# Altium PCB PC110.PcbDoc (part 22 of 24)
Units mm, origin at the board's own origin, x right, y up, seen from the top; angles counter-clockwise.
Board outline 150.05 x 107.35 mm, 10 copper layers (In2.Cu, F.Cu, B.Cu, In1.Cu, In3.Cu, In4.Cu, In5.Cu, In6.Cu, In7.Cu, In8.Cu); 936 components, 1434 nets, 4891 pads, 6088 vias.
Unrouted connection lines stored in the file: 2995.
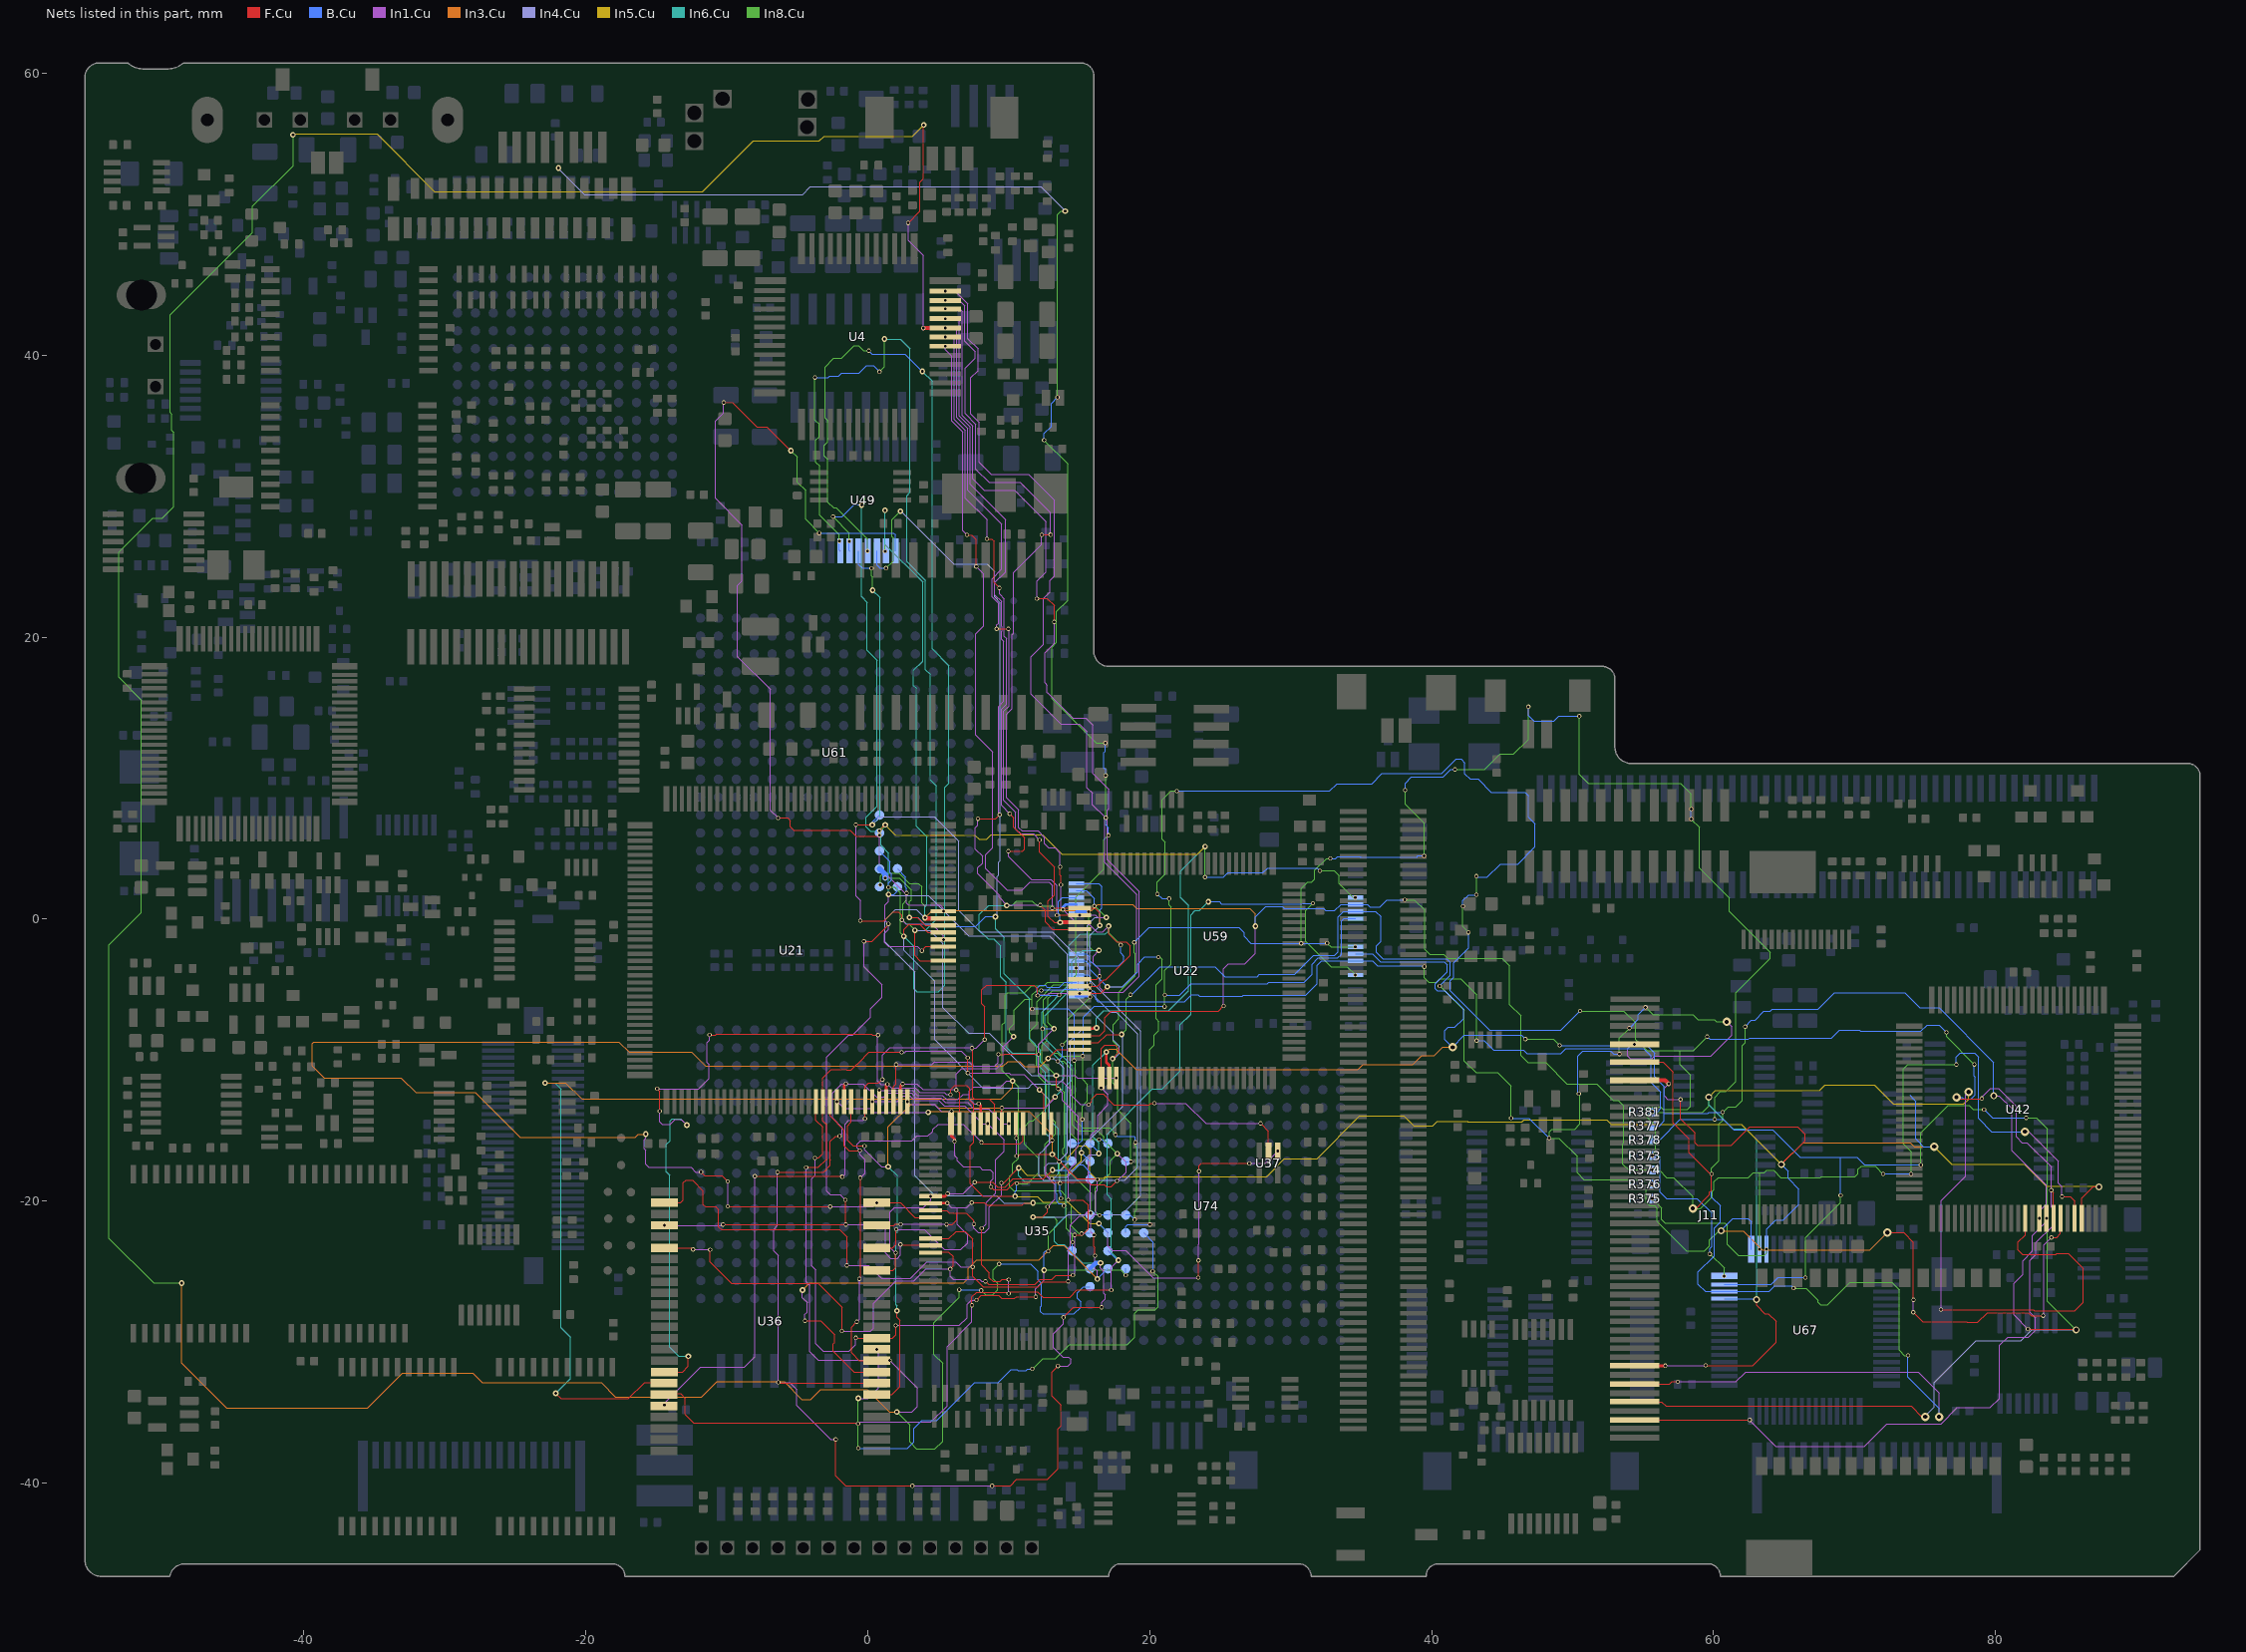
[diagram p29: the nets of this part, all layers, seen from the top]

## Via types
v1: diameter 0.3, hole 0.2, B.Cu to In8.Cu, tented both sides, 1934 vias
v2: diameter 0.4, hole 0.2, F.Cu to B.Cu, tented both sides, 1902 vias
v3: diameter 0.3, hole 0.2, F.Cu to In1.Cu, tented both sides, 1729 vias
v4: diameter 0.6, hole 0.3, F.Cu to B.Cu, tented both sides, 354 vias
v5: diameter 0.5, hole 0.3, F.Cu to B.Cu, tented both sides, 136 vias
v6: diameter 0.4, hole 0.2, B.Cu to In8.Cu, tented both sides, 12 vias
v7: diameter 0.3, hole 0.2, F.Cu to B.Cu, tented both sides, 6 vias
v8: diameter 0.6, hole 0.2, F.Cu to B.Cu, tented both sides, 4 vias
v9: diameter 0.5, hole 0.2, B.Cu to In8.Cu, tented both sides, 3 vias
v10: diameter 0.5, hole 0.2, F.Cu to B.Cu, tented both sides, 2 vias
v11: diameter 0.4, hole 0.3, F.Cu to B.Cu, tented both sides, 2 vias
v12: diameter 0.3, hole 0.2, F.Cu to In4.Cu, tented both sides, 2 vias
v13: diameter 0.6, hole 0.3, B.Cu to In8.Cu, tented both sides, 1 vias
v14: diameter 0.3, hole 0.2, F.Cu to In3.Cu, tented both sides, 1 vias

## Nets (pads, with @x,y where several pads share a name; then routed paths per layer and width w, separated by ;. In a path a pad name is that pad's centre, name@x,y a point inside that pad or via, vN(x,y) a via of type N, cw(c..) or ccw(c..) an arc to the next point about the centre after c; other vN are vias at no path point) (continued)
SA3: U4.45 U21.58 U22.29 U35.11 U36.11 U59.18 U74.E4 | length 144.3
  F.Cu w0.08: v3(-3.74,-16.93) -3.49,-16.93 -3.195,-16.635 -3.195,-14.735 -3.68,-14.25 U21.58@-3.68,-12.94 ; v3(-0.85,-29.69) -0.83,-29.71 U36.11@0.63,-29.71 1.75,-29.71 1.99,-29.47 v3(1.99,-28.81) ; v3(7.04,27.25) 7.37,27.25 7.7,26.92 v3(7.7,25.01) ; v3(7.72,-27.02) 8.06,-26.68 9.28,-26.68 9.5,-26.9 10.42,-26.9 10.54,-26.78 v3(11.91,-26.78) ; v2(11.73,-21.13) 12.38,-21.13 12.75,-20.76 v3(12.75,-20.41) ; U35.11@13.01,-14.5 13.01,-15.6 v3(13.09,-15.68) ; v3(13.09,0.8) 13.1,0.79 16.11,0.79 16.46,0.44 v2(16.46,-0.44)
  In1.Cu w0.08: v3(-3.74,-16.93) -3.74,-18.15 -3.98,-18.39 -3.98,-24.59 -3.69,-24.88 -3.69,-30.12 -3.17,-30.64 -1.33,-30.64 -0.85,-30.16 v3(-0.85,-29.69) ; v3(1.99,-28.81) 6.49,-28.81 7.04,-28.26 7.04,-27.31 7.33,-27.02 v3(7.72,-27.02) ; v3(5.5,40.64) 5.5,40.41 5.96,39.95 5.96,35.32 6.73,34.55 6.73,27.56 v3(7.04,27.25) ; v3(7.7,25.01) 8.24,24.47 8.24,20.82 7.67,20.25 7.67,13.06 8.86,11.87 8.86,5.08 8.36,4.58 8.36,3.59 9.87,2.08 10.96,2.08 11.5,2.62 12.85,2.62 13.09,2.38 v3(13.09,0.8) ; v3(11.91,-26.78) 11.91,-26.21 12.51,-25.61 v2(12.51,-24.89) ; v3(12.75,-20.41) 13.29,-19.87 13.29,-18.84 12.64,-18.19 12.64,-16.13 v3(13.09,-15.68)
  In4.Cu w0.08: v2(11.73,-21.13) 11.74,-21.14 14.01,-21.14 14.19,-20.96 18.03,-20.96 19.37,-19.62 19.37,-7.93 15.77,-4.33 15.77,-1.16 16.46,-0.47 v2(16.46,-0.44)
  In8.Cu w0.08: v2(11.73,-21.13) 11.74,-21.14 13.2,-21.14 13.42,-21.36 13.42,-21.73 12.81,-22.34 v1(12.81,-23.54) ; v2(12.51,-24.89) 17.94,-24.89 v1(18.3,-25.25)
  B.Cu w0.08: v2(12.51,-24.89) 12.51,-23.64 12.61,-23.54 v1(12.81,-23.54) ; U59.18@14.79,2.54 16.4,2.54 16.61,2.33 16.61,2.29 16.62,2.28 16.62,0.79 16.47,0.64 16.47,0.56 16.46,0.55 v2(16.46,-0.44) ; v1(18.3,-25.25) U74.E4@18.3,-24.77
SA4: U4.46 U21.59 U22.30 U35.12 U36.10 U59.17 U74.G5 | length 176.1
  F.Cu w0.08: v3(-4.37,-17.6) -3.51,-17.6 -2.93,-17.02 -2.93,-14.57 -3.18,-14.32 U21.59@-3.18,-12.94 -3.18,-11.26 -2.595,-10.675 -1.525,-10.675 -1.49,-10.71 -1.17,-10.71 -0.26,-9.8 -0.26,-9.77 0.085,-9.425 2.375,-9.425 v3(2.4,-9.45) ; v3(7.09,-9.83) 7.09,-10.9 v3(7.1,-10.91) ; v3(8.46,26.97) 8.8,26.97 8.96,26.81 8.96,23.87 v3(9.34,23.49) ; v3(9.98,4.82) 10.99,4.82 11.12,4.95 11.12,5.77 10.36,6.53 10.36,7.19 v3(10.07,7.48) ; v2(12.18,-12.1) 12.51,-12.43 U35.12@12.51,-14.5 ; v3(13.42,0.28) 13.43,0.29 v3(15.03,0.29)
  In1.Cu w0.08: v3(-4.37,-17.6) -4.37,-25.71 -4.11,-25.97 -4.11,-30.69 -3.53,-31.27 0.75,-31.27 ; v2(-0.67,-33.98) 0.01,-33.98 0.75,-33.24 0.75,-31.27 ; v3(0.63,-30.51) 0.77,-30.65 0.77,-31.25 0.75,-31.27 ; v3(2.4,-9.45) 2.64,-9.45 2.72,-9.37 6.63,-9.37 v3(7.09,-9.83) ; v3(5.5,41.29) 6.03,41.29 6.13,41.19 6.13,35.45 6.92,34.66 6.92,29.86 8.46,28.32 v3(8.46,26.97) ; v3(7.1,-10.91) 10.03,-10.91 10.12,-11 11.08,-11 v2(12.18,-12.1) ; v3(9.34,23.49) 9.34,23.07 9.69,22.72 9.69,20.07 9.84,19.92 9.84,15.26 9.48,14.9 9.48,8.07 v3(10.07,7.48) ; v3(9.98,4.82) 9.98,4.45 11.62,2.81 13.01,2.81 13.42,2.4 v3(13.42,0.28) ; v3(15.03,0.29) 16.14,0.29 16.31,0.12 v2(16.92,0.12)
  In4.Cu w0.08: v2(12.18,-12.1) 12.89,-12.81 12.89,-15.93 12.49,-16.33 12.49,-16.34 12.15,-16.68 12.15,-18.2 12.46,-18.51 18.22,-18.51 19.15,-17.58 19.15,-8.14 17.62,-6.61 17.22,-6.61 15.58,-4.97 15.58,-1.45 15.57,-1.44 15.57,-0.43 16.12,0.12 v2(16.92,0.12)
  In8.Cu w0.08: v2(-0.67,-33.98) -0.67,-37.51 v1(-0.66,-37.52) ; v1(11.68,-31.9) 12.43,-31.15 13.33,-31.15 14.31,-30.17 18.42,-30.17 18.95,-29.64 18.95,-27.94 19.2,-27.69 20.4,-27.69 20.59,-27.5 20.59,-25.35 v1(20.21,-24.97) ; v1(16.07,0.94) 16.1,0.94 v2(16.92,0.12)
  B.Cu w0.08: v1(-0.66,-37.52) 2.83,-37.52 3.29,-37.06 3.29,-36.1 3.84,-35.55 4.91,-35.55 7.58,-32.88 9.24,-32.88 10.17,-31.95 10.6,-31.95 10.67,-32.02 11.22,-32.02 11.34,-31.9 v1(11.68,-31.9) ; U59.17@14.79,2.04 15.49,2.04 16.07,1.46 v1(16.07,0.94) ; U74.G5@19.57,-22.23 20.26,-22.92 20.26,-24.92 v1(20.21,-24.97)
SA5: U4.47 U21.60 U22.31 U35.15 U36.9 U59.16 U74.D2 | length 348.2
  F.Cu w0.08: U21.60@-2.68,-12.94 -2.68,-13.95 -1.66,-14.97 -1.66,-16.06 -1.31,-16.41 v3(-0.56,-16.41) ; v3(-0.78,-28.55) -1.16,-28.93 -1.16,-30.75 -0.6,-31.31 U36.9@0.63,-31.31 0.65,-31.29 v3(1.55,-31.29) ; v3(-0.59,-25.51) -0.52,-25.44 v3(-0.52,-18.34) ; v3(2.87,49.38) 3.7,50.21 3.7,52.27 3.96,52.53 3.96,56.32 v2(3.97,56.33) ; v3(8.07,-15.83) 8.16,-15.92 10.79,-15.92 11.01,-15.7 U35.15@11.01,-14.5 ; v3(9.14,20.6) 9.96,20.6 v3(9.97,20.59) ; v3(12.18,5.62) 12.18,4.76 13.25,3.69 13.25,1.73 12.8,1.28 12.8,0.21 13.24,-0.23 v2(13.65,-0.23)
  F.Cu w0.3: v3(3.94,41.92) 3.96,41.94 v3(5.5,41.94) ; v2(13.65,-0.23) 13.67,-0.21 U22.31@15.03,-0.21
  In1.Cu w0.08: v3(-0.78,-28.55) -0.59,-28.36 v3(-0.59,-25.51) ; v3(-0.52,-18.34) -0.2,-18.02 -0.2,-17.07 -0.56,-16.71 v3(-0.56,-16.41) -0.77,-16.2 -0.77,-15.98 -0.52,-15.73 3.13,-15.73 3.48,-15.38 4.28,-15.38 4.62,-15.04 4.62,-14.92 5,-14.54 6.78,-14.54 v3(8.07,-15.83) ; v3(1.55,-31.29) 3.51,-33.25 3.51,-34.57 3.13,-34.95 v2(2.06,-34.95) ; v3(2.87,49.38) 2.87,48.14 3.94,47.07 v3(3.94,41.92) ; v3(5.5,41.94) 6.14,41.94 6.3,41.78 6.3,35.58 7.09,34.79 7.09,30.42 9.5,28.01 9.5,24.83 8.81,24.14 8.81,22.87 9.27,22.41 9.27,20.99 9.14,20.86 v3(9.14,20.6) ; v3(9.97,20.59) 10.02,20.54 10.02,15.13 9.65,14.76 9.65,8.43 10.5,7.58 10.5,6.39 10.84,6.05 11.75,6.05 v3(12.18,5.62)
  In3.Cu w0.08: v2(-48.67,-25.81) -48.67,-31.5 -45.49,-34.68 -35.48,-34.68 -33.01,-32.21 -28,-32.21 -27.34,-32.87 -18.91,-32.87 -17.9,-33.88 -11.78,-33.88 -10.7,-32.8 -5.92,-32.8 -4.67,-34.05 -4.04,-34.05 -3.34,-33.35 -0.06,-33.35 1.54,-34.95 v2(2.06,-34.95)
  In5.Cu w0.08: v2(-40.77,55.63) -40.71,55.69 -34.82,55.69 -30.74,51.61 -11.7,51.61 -8.1,55.21 -3.43,55.21 -3.1,55.54 3.18,55.54 v2(3.97,56.33)
  In8.Cu w0.08: v2(-48.67,-25.81) -50.66,-25.81 -53.83,-22.64 -53.83,-1.82 -51.53,0.48 -51.53,15.55 -53.13,17.15 -53.13,26.03 -50.73,28.43 -50.06,28.43 -49.23,29.26 -49.23,34.53 -49.37,34.67 -49.37,35.81 -49.49,35.93 -49.49,42.86 -43.64,48.71 -43.64,50.57 -40.76,53.45 -40.76,55.62 v2(-40.77,55.63) ; v2(2.06,-34.95) 2.78,-35.67 2.79,-35.67 2.98,-35.86 2.98,-37.08 3.46,-37.56 4.77,-37.56 5.31,-37.02 5.31,-31.5 4.69,-30.88 4.69,-28.62 6.49,-26.82 v1(6.49,-26.28) ; v1(8.05,-26.33) 8.35,-26.63 8.87,-26.63 9.21,-26.29 9.21,-25.84 8.89,-25.52 8.89,-24.88 v1(9.32,-24.45)
  B.Cu w0.08: v1(6.49,-26.28) 8,-26.28 v1(8.05,-26.33) ; v1(9.32,-24.45) 11.56,-24.45 12.09,-24.98 12.09,-25.58 12.34,-25.83 12.34,-27.43 12.27,-27.5 12.27,-27.84 12.43,-28 14.64,-28 15.11,-27.53 15.11,-27.13 14.88,-26.9 14.88,-26.49 15.31,-26.06 U74.D2@15.765,-26.06 ; v2(13.65,-0.23) 13.65,0.3 13.53,0.42 13.53,1.26 13.81,1.54 U59.16@14.79,1.54
SA6: U4.48 U21.61 U22.32 U35.16 U36.8 U59.15 U74.E3 | length 150.3
  F.Cu w0.08: v3(-4.46,-28.48) -3.32,-28.48 -2.345,-29.455 -2.345,-30.025 -2.44,-30.12 -2.44,-30.63 -0.96,-32.11 U36.8@0.63,-32.11 ; v3(7.81,7.13) 9.07,7.13 v3(9.35,7.41) ; U35.16@10.51,-14.5 10.54,-14.53 v3(10.54,-15.52) ; v3(10.56,-16.8) 10.67,-16.8 10.79,-16.68 v2(13.09,-16.68) 14.83,-18.42 16.25,-18.42 v3(16.28,-18.45) ; v3(12.23,1.01) 12.62,0.62 12.62,-0.21 13.12,-0.71 U22.32@15.03,-0.71 ; v3(16.05,-22.4) 16.05,-23.21 16.12,-23.28 v3(16.12,-23.86)
  In1.Cu w0.08: v2(-4.63,-26.31) -4.63,-26.84 -4.3,-27.17 -4.3,-27.87 -4.46,-28.03 v3(-4.46,-28.48) ; v3(-2.18,-12.94) -1.69,-13.43 0.17,-13.43 0.43,-13.69 v2(4.29,-13.69) ; v3(5.5,42.59) 6.32,42.59 6.5,42.41 6.5,35.68 7.28,34.9 7.28,30.83 9.78,28.33 9.78,24.63 9.015,23.865 9.015,23.015 9.49,22.54 9.49,20.78 9.515,20.755 9.515,20.445 9.49,20.42 9.49,19.86 9.64,19.71 9.64,15.45 9.28,15.09 9.28,7.48 v3(9.35,7.41) ; v3(7.81,7.13) 7.81,6.67 7.62,6.48 7.62,4.98 8.14,4.46 8.14,3.99 7.8,3.65 7.8,3.24 9.31,1.73 9.31,1.57 9.86,1.02 v2(9.86,0.97) 9.9,1.01 v3(12.23,1.01) ; v3(10.54,-15.52) 10.56,-15.54 v3(10.56,-16.8) ; v3(16.05,-22.4) 15.82,-22.17 15.82,-21.25 16.19,-20.88 16.19,-19.32 16.28,-19.23 v3(16.28,-18.45) ; v3(16.12,-23.86) 16.12,-24.8 16.28,-24.96 v2(16.28,-25.52)
  In3.Cu w0.08: -4.63,-26.24 v2(-4.63,-26.31) -4.13,-25.81 6.8,-25.81 7.13,-25.48 7.13,-24.76 7.74,-24.15 12.15,-24.15 13.16,-23.14 13.9,-23.14 v2(16.28,-25.52) ; v2(4.29,-13.69) 4.34,-13.64 11.45,-13.64 13.09,-15.28 v2(13.09,-16.68)
  In6.Cu w0.08: v2(9.86,0.97) 8.56,0.97 7.92,0.33 7.92,-0.8 8.53,-1.41 8.94,-1.41 9.44,-1.91 9.44,-4.1 9.82,-4.48 9.82,-9.08 10.23,-9.49 11.78,-9.49 12.07,-9.78 12.07,-10.35 12.61,-10.89 12.61,-15.18 12.95,-15.52 12.95,-15.53 13.09,-15.67 v2(13.09,-16.68)
  In8.Cu w0.08: v2(9.86,0.97) 10.23,0.97 10.55,1.29 11.67,1.29 12.04,0.92 13.12,0.92 13.35,0.69 v1(13.85,0.69)
  B.Cu w0.08: v2(16.28,-25.52) 17.01,-24.79 U74.E3@17.035,-24.79 17.035,-24.795 U74.E3@17.03,-24.8
  B.Cu w0.2: v1(13.85,0.69) 13.85,0.84 14.05,1.04 U59.15@14.79,1.04
SA7: U4.49 U21.62 U22.39 U35.17 U36.7 U59.14 U74.E2 | length 190.9
  F.Cu w0.08: v3(-6.4,-17.94) -3.13,-17.94 -2.65,-17.46 -2.65,-17.08 -2.665,-17.065 -2.665,-15.765 -2.29,-15.39 v3(-1.99,-15.39) ; v3(-6.34,-32.85) -6.28,-32.91 U36.7@0.63,-32.91 ; v3(-2.27,-36.89) -2.27,-39.49 -1.57,-40.19 v3(3.17,-40.19) ; v3(8.82,-40.19) 10.12,-40.19 10.57,-39.74 12.75,-39.74 13.5,-38.99 13.5,-36.16 13.71,-35.95 13.71,-34.45 13.07,-33.81 13.07,-32.11 v3(13.49,-31.69) ; v3(12,22.74) 12.73,22.74 13.23,22.24 v3(13.23,21.09) ; v3(13.88,-28.24) 14.6,-27.52 v3(16.58,-27.52) ; U22.39@15.03,-4.26 16.24,-4.26 v3(16.45,-4.05)
  F.Cu w0.2: U21.62@-1.68,-12.94 -1.68,-11.79 v3(-1.56,-11.67)
  In1.Cu w0.08: v3(-6.4,-17.94) -6.4,-21.74 -6.67,-22.01 -6.67,-23.53 -6.34,-23.86 v3(-6.34,-32.85) -5.53,-32.85 -5.02,-33.36 -5.02,-34.49 -2.62,-36.89 v3(-2.27,-36.89) ; v3(-1.99,-15.39) -1.8,-15.2 -1.8,-14.79 -2.5,-14.09 -2.5,-12.31 -1.86,-11.67 v3(-1.56,-11.67) -0.32,-11.67 0.61,-12.6 1.16,-12.6 1.42,-12.34 3.09,-12.34 3.42,-12.67 5.17,-12.67 5.51,-13.01 7.09,-13.01 7.53,-13.45 8.59,-13.45 9.64,-14.5 v3(10.01,-14.5) ; v3(3.17,-40.19) v3(8.82,-40.19) ; v3(5.5,43.29) 6.54,43.29 6.71,43.12 6.71,35.73 7.46,34.98 7.46,31.23 8.25,30.44 10.4,30.44 12.64,28.2 12.64,24.64 12,24 v3(12,22.74) ; v3(13.23,21.09) 13.23,19.56 12.56,18.89 12.56,16.76 12.72,16.6 12.72,16.07 12.74,16.07 14.55,14.26 15.46,14.26 15.96,13.76 15.96,10.35 17.11,9.2 17.11,7.85 16.98,7.72 16.98,4.24 19.25,1.97 19.25,-4.06 18.14,-5.17 16.75,-5.17 16.45,-4.87 v3(16.45,-4.05) 16.45,-3.6 15.99,-3.14 15.99,-2.62 v2(16.4,-2.21) ; v3(13.49,-31.69) 14.2,-31.69 14.4,-31.49 14.4,-31.22 14.25,-31.07 13.84,-31.07 13.16,-30.39 13.16,-29.4 13.88,-28.68 v3(13.88,-28.24) ; v2(16.51,-24.38) 16.51,-24.73 16.72,-24.94 16.72,-24.99 16.74,-25.01 16.74,-26.54 16.85,-26.65 16.85,-26.91 16.59,-27.17 16.59,-27.51 v3(16.58,-27.52)
  In6.Cu w0.08: v2(16.4,-2.21) 15.26,-2.21 14.49,-2.98 14.49,-4.91 12.57,-6.83 12.57,-8.47 14.49,-10.39 14.49,-11.39 14.06,-11.82 14.06,-21.05 13.24,-21.87 13.24,-22.87 13.44,-23.07 13.9,-23.07 15.21,-24.38 v2(16.51,-24.38)
  In8.Cu w0.08: v1(15.67,0.54) 15.67,-1.93 15.95,-2.21 v2(16.4,-2.21)
  B.Cu w0.2: U59.14@14.79,0.54 v1(15.67,0.54)
  B.Cu w0.3: U74.E2@15.765,-24.79 16.175,-24.38 v2(16.51,-24.38)
SA8: U4.50 U21.63 U22.40 U35.18 U36.6 U59.8 U74.F1 | length 145.7
  F.Cu w0.08: U21.63@-1.18,-12.94 -1.18,-14.38 -1.44,-14.64 -1.44,-15.68 -1.04,-16.08 v3(-0.23,-16.08) ; U36.6@0.63,-33.71 1.73,-33.71 2.28,-33.16 2.28,-28.44 2.07,-28.23 v2(2.07,-27.77) ; U35.18@9.51,-14.5 v3(9.51,-13.38) ; v3(12.34,27.26) 12.96,27.26 v3(12.97,27.27) ; v3(13.65,3.72) 13.65,3.12 13.7,3.07 13.7,2.45 v3(13.71,2.44) ; U22.40@15.03,-4.76 16.28,-4.76 16.75,-4.29 16.9,-4.29 18.63,-2.56 18.63,-1.9 18.62,-1.9 18.34,-1.62 17.68,-1.62 17.09,-1.03 v2(17.09,-0.49)
  In1.Cu w0.08: v3(-0.23,-16.08) -0.23,-16.34 0.98,-17.55 v2(1.45,-17.55) ; v3(5.5,43.89) 6.5,43.89 6.89,43.5 6.89,40.98 7.62,40.25 7.62,39.795 6.9,39.075 6.9,35.86 7.67,35.09 7.67,31.92 8.6,30.99 10.8,30.99 12.97,28.82 v3(12.97,27.27) ; v3(9.51,-13.38) 12.58,-13.38 13.28,-12.68 13.28,-12.62 v2(13.29,-12.61) ; v3(12.34,27.26) 12.34,26.58 10.36,24.6 10.36,20.28 10.25,20.17 10.25,14.93 9.86,14.54 9.86,8.6 10.7,7.76 10.7,6.5 10.94,6.26 12.07,6.26 12.54,5.79 12.54,5.37 12.83,5.08 13.27,5.08 13.65,4.7 v3(13.65,3.72) ; v3(13.71,2.44) 13.71,0.82 14.81,-0.28 15.63,-0.28 16.25,-0.9 16.68,-0.9 v2(17.09,-0.49)
  In3.Cu w0.08: v2(1.45,-17.55) 1.45,-14.73 3.05,-13.13 4.77,-13.13 5.02,-13.38 12.52,-13.38 v2(13.29,-12.61)
  In6.Cu w0.08: v2(1.45,-17.55) 2.09,-18.19 2.09,-22.18 2.01,-22.26 2.01,-27.33 2,-27.34 2.07,-27.41 v2(2.07,-27.77) ; v2(13.29,-12.61) 13.85,-12.05 13.85,-10.22 12.35,-8.72 12.35,-6.59 14.28,-4.66 14.28,-1.87 15.09,-1.06 16.86,-1.06 17.09,-0.83 v2(17.09,-0.49)
  In8.Cu w0.08: v1(13.06,-18.39) 12.59,-17.92 12.59,-15.95 13.33,-15.21 13.33,-14.42 12.87,-13.96 12.87,-13.03 v2(13.29,-12.61) ; v1(13.92,-20.32) 14.11,-20.51 14.11,-21.95 14.53,-22.37 v1(14.53,-22.91) ; v2(17.09,-0.49) 17.09,-0.97 v1(17.95,-1.83)
  B.Cu w0.08: v1(13.06,-18.39) 13.35,-18.68 13.35,-19.42 13.41,-19.48 13.41,-20.04 13.54,-20.17 13.74,-20.17 13.89,-20.32 v1(13.92,-20.32) ; U74.F1@14.495,-23.52 14.53,-23.485 v1(14.53,-22.91) ; U59.8@14.79,-2.46 15.51,-2.46 15.69,-2.64 15.69,-2.87 16.13,-3.31 17.81,-3.31 18.17,-2.95 18.17,-2.62 17.95,-2.4 v1(17.95,-1.83)
SA9: U4.51 U21.65 U22.41 U35.19 U36.44 U59.7 U74.G4 | length 156.5
  F.Cu w0.08: v3(-8,-18.23) -1.85,-18.23 v3(-1.81,-18.27) ; v3(-0.19,-14.15) -0.18,-14.14 U21.65@-0.18,-12.94 -0.18,-11.87 0.06,-11.63 0.78,-11.63 v3(1.04,-11.37) ; v3(7.4,-9.14) 7.45,-9.19 7.45,-12.64 7.55,-12.74 8.62,-12.74 9.01,-13.13 U35.19@9.01,-14.5 ; v3(8.3,-8.54) 8.3,-6.19 8.1,-5.99 8.1,-5 8.43,-4.67 11.79,-4.67 12.05,-4.93 v3(12.05,-5.41) ; v3(15.03,-5.26) 16.52,-5.26 v2(16.99,-4.79)
  In1.Cu w0.08: v3(-14.42,-34.46) -14.42,-34.31 -11.87,-31.76 -8.74,-31.76 -8,-31.02 v3(-8,-18.23) ; v3(-1.81,-18.27) -1.61,-18.07 -1.61,-14.54 -1.35,-14.28 -0.32,-14.28 v3(-0.19,-14.15) ; v3(1.04,-11.37) 1.04,-9.64 1.58,-9.1 7.36,-9.1 v3(7.4,-9.14) 7.7,-9.14 v3(8.3,-8.54) ; v3(5.5,44.54) 6.21,44.54 7.09,43.66 7.09,41.18 7.82,40.45 7.82,38.92 7.31,38.41 7.31,35.83 7.91,35.23 7.91,32.4 8.75,31.56 11.41,31.56 13.26,29.71 13.26,24.34 12.93,24.01 12.93,23.21 12.47,22.75 12.47,19.51 11.59,18.63 11.59,15.95 13.69,13.85 15.03,13.85 15.56,13.32 15.56,9.33 15.94,8.95 15.94,8.13 16.8,7.27 16.8,4.02 19.08,1.74 19.08,-3.78 18.07,-4.79 v2(16.99,-4.79) ; v3(12.05,-5.41) 12.12,-5.34 12.76,-5.34 12.84,-5.26 v3(15.03,-5.26)
  In8.Cu w0.08: v1(20.02,-21.66) 19.99,-21.63 19.99,-9.25 20.31,-8.93 20.31,-8.22 20.64,-7.89 20.64,-7.25 20.44,-7.05 20.44,-4.66 20.87,-4.23 20.87,-2.86 20.69,-2.68 v1(20.62,-2.68)
  B.Cu w0.08: U59.7@14.79,-2.96 15.44,-2.96 15.75,-3.27 15.75,-3.55 v2(16.99,-4.79) 18.09,-4.79 19.14,-3.74 19.14,-3.2 19.66,-2.68 v1(20.62,-2.68) ; U74.G4@18.3,-22.23 18.3,-21.79 18.44,-21.65 20.01,-21.65 v1(20.02,-21.66)
SA10: U21.66 U35.20 U36.43 U59.36 U74.F3 | length 112.6
  F.Cu w0.08: U36.43@-14.42,-33.66 -13.27,-33.66 -12.94,-33.99 -12.94,-35.13 -12.34,-35.73 -0.73,-35.73 v3(-0.68,-35.78) ; v3(7.39,-27.38) 7.39,-26.8 7.74,-26.45 9.89,-26.45 v3(9.99,-26.55) 10.1,-26.44 12.05,-26.44 12.42,-26.81 14.34,-26.81 14.85,-26.3 v3(17.27,-26.3) ; v3(8.08,-21.92) 8.08,-24.52 8.63,-25.07 8.63,-25.44 8.89,-25.7 9.4,-25.7 9.54,-25.56 v3(10,-25.56)
  In1.Cu w0.08: v3(-0.68,-35.78) -0.56,-35.66 4.49,-35.66 5.63,-34.52 5.63,-30.31 7.39,-28.55 v3(7.39,-27.38) ; v3(0.32,-12.94) 2.1,-12.94 2.51,-12.53 2.99,-12.53 3.33,-12.87 5.05,-12.87 5.43,-13.25 6.89,-13.25 8.14,-14.5 v3(8.51,-14.5) 9.66,-15.65 9.66,-16.46 9.07,-17.05 9.07,-19.42 8.39,-20.1 8.39,-21.61 v3(8.08,-21.92) ; v3(9.99,-26.55) 10,-26.54 v3(10,-25.56) ; v3(17.27,-26.3) 17.27,-24.7 v2(17.78,-24.19)
  In6.Cu w0.08: v2(17.78,-24.19) 17.78,-24.14 17.28,-23.64 17.28,-19.85 16.98,-19.55 16.98,-15.25 20.18,-12.05 20.87,-12.05 22.17,-10.75 22.17,-7.48 22.93,-6.72 22.93,0.31 23.23,0.61 23.53,0.61 v2(24.16,1.24)
  In8.Cu w0.08: v1(31.57,1.13) 31.07,0.63 31.07,-1.57 32.87,-3.37 34,-3.37 v1(34.59,-3.96)
  B.Cu w0.08: U74.F3@17.03,-23.5 17.72,-24.19 v2(17.78,-24.19) ; v2(24.16,1.24) 24.93,1.24 25.09,1.08 30.79,1.08 30.84,1.13 v1(31.57,1.13)
SA11: U21.67 U35.21 U36.42 U59.6 U74.G2 | length 205.3
  F.Cu w0.08: v2(-22.13,-33.63) -21.75,-34.01 -16.97,-34.01 -15.82,-32.86 U36.42@-14.42,-32.86 ; U21.67@0.82,-12.94 v3(0.82,-12.13)
  F.Cu w0.2: v3(7.87,-13.09) 8.01,-13.23 U35.21@8.01,-14.5
  In1.Cu w0.08: v3(0.82,-12.13) 0.85,-12.16 3.18,-12.16 3.51,-12.49 5.29,-12.49 5.59,-12.79 6.4,-12.79 6.76,-12.43 7.21,-12.43 ; v3(7.87,-13.09) 7.55,-13.09 7.21,-12.75 7.21,-12.43 ; v2(10.27,-11.47) 9.84,-11.47 9.42,-11.89 7.51,-11.89 7.21,-12.19 7.21,-12.43
  In3.Cu w0.08: v2(-22.89,-11.61) -21.43,-11.61 -20.28,-12.76 9.45,-12.76 10.27,-11.94 v2(10.27,-11.47)
  In4.Cu w0.08: v2(-21.94,53.28) -21.94,53.23 -20.1,51.39 -4.62,51.39 -4.07,51.94 12.29,51.94 v2(14.01,50.22)
  In6.Cu w0.08: v2(-22.89,-11.61) -22.19,-11.61 -21.76,-12.04 -21.76,-28.96 -21.08,-29.64 -21.08,-32.58 v2(-22.13,-33.63)
  In8.Cu w0.08: v1(12.51,33.97) 14.19,32.29 14.19,22.61 13.4,21.82 13.4,19.64 13.06,19.3 13.06,15.66 16.22,12.5 v1(16.85,12.5) ; v1(13.46,37.02) 13.46,49.98 13.7,50.22 v2(14.01,50.22) ; v1(15.17,-22.3) 14.97,-22.3 14.43,-21.76 14.43,-20.3 14.03,-19.9 14.03,-19.59 13.69,-19.25 10.35,-19.25 10.07,-18.97 10.07,-18.23 10.28,-18.02 10.28,-17.35 10.69,-16.94 10.69,-11.89 v2(10.27,-11.47) 9.54,-10.74 9.54,-7.48 9.73,-7.29 9.73,-5.39 9.91,-5.21 11.14,-5.21 11.63,-4.72 12.49,-4.72 12.75,-4.46 14.27,-4.46 14.79,-3.94 v1(14.79,-3.46) 14.78,-3.45 14.78,1.56 16.76,3.54 16.76,5.63 v1(17.08,5.95) ; v1(16.88,10.2) 16.89,10.19 v1(16.89,7.19)
  B.Cu w0.08: v1(12.51,33.97) 12.51,34.45 13.02,34.96 13.02,36.58 v1(13.46,37.02) ; v1(15.17,-22.3) 15.22,-22.25 U74.G2@15.765,-22.25 15.765,-22.255 U74.G2@15.76,-22.26 ; v1(16.85,12.5) 16.85,11.9 16.76,11.81 16.76,10.73 16.88,10.61 v1(16.88,10.2) ; v1(16.89,7.19) 16.89,6.69 17.08,6.5 v1(17.08,5.95)
SA12: U21.68 U35.22 U36.41 U37.1 U59.5 U74.G3 | length 121.9
  F.Cu w0.08: v3(-14.94,-12.03) -14.76,-12.21 v3(-14.76,-13.61) ; U36.41@-14.42,-32.11 -13.14,-32.11 -12.73,-31.7 v2(-12.73,-31) ; v3(-11.22,-8.21) -10.78,-8.21 -10.73,-8.16 0.27,-8.16 0.33,-8.22 v3(0.73,-8.22) ; v3(5.88,-12.44) 5.88,-12.09 6.18,-11.79 7.03,-11.79 7.23,-11.99 7.23,-12.84 7.51,-13.12 7.51,-15.81 7.26,-16.06 7.26,-18.76 8.15,-19.65 v2(10.45,-19.65) ; v3(23.45,-25.43) 23.46,-25.42 v3(23.46,-24.2) ; v3(23.5,-17.87) 23.5,-17.49 23.67,-17.32 v3(27.07,-17.32)
  F.Cu w0.2: U21.68@1.32,-12.94 1.32,-11.79 v3(1.4,-11.71)
  In1.Cu w0.08: v3(-14.94,-12.03) -12.01,-12.03 -11.27,-11.29 -11.27,-10.29 -11.4,-10.16 -11.4,-8.76 -11.22,-8.58 v3(-11.22,-8.21) ; v3(-14.76,-13.61) -14.76,-14.38 -14.58,-14.56 -14.03,-14.56 -13.67,-14.2 -13.23,-14.2 v2(-12.83,-14.6) ; v3(0.73,-8.22) 0.68,-8.27 0.68,-11.46 0.93,-11.71 v3(1.4,-11.71) 1.67,-11.98 3.39,-11.98 3.69,-12.28 5.42,-12.28 5.58,-12.44 v3(5.88,-12.44) ; v2(16.4,-21.59) 17.04,-22.23 17.04,-23.17 17.35,-23.48 18.31,-23.48 20.26,-25.43 v3(23.45,-25.43) ; v3(23.46,-24.2) 23.45,-24.19 23.45,-23.08 23.5,-23.03 v3(23.5,-17.87) ; v3(27.07,-17.32) 28.21,-17.32 v3(29.08,-16.45)
  In5.Cu w0.08: v2(10.45,-19.65) 10.48,-19.68 12.06,-19.68 12.44,-20.06 14.21,-20.06 15.74,-21.59 v2(16.4,-21.59)
  In6.Cu w0.08: v2(-12.83,-14.6) -13.19,-14.24 -13.22,-14.24 -13.3,-14.16 -13.86,-14.16 -14.02,-14.32 -14.02,-15.7 -14.3,-15.98 -14.3,-17.9 -14.04,-18.16 -14.04,-30.36 -13.4,-31 v2(-12.73,-31)
  In8.Cu w0.08: v1(10.58,-18.74) 11.35,-18.74 12.12,-17.97 12.12,-16.95 11.12,-15.95 11.12,-14.71 11.51,-14.32 11.74,-14.32 12.68,-13.38 12.68,-11.73 12.1,-11.15 12.1,-10.51 11.98,-10.39 11.98,-9.08 11.5,-8.6 11.5,-7.95 12,-7.45 12,-5.84 13.18,-4.66 v1(15.78,-4.66)
  B.Cu w0.08: v2(10.45,-19.65) 10.45,-19.33 10.56,-19.22 10.56,-18.76 v1(10.58,-18.74) ; U59.5@14.79,-3.96 15.64,-3.96 15.78,-4.1 v1(15.78,-4.66) ; v2(16.4,-21.59) 16.4,-21.6 U74.G3@17.03,-22.23
SA13: U21.69 U37.2 U59.4 U74.H2 | length 61.9
  F.Cu w0.08: U21.69@1.82,-12.94 1.82,-11.86 2.01,-11.67 v3(2.01,-10.31) ; v3(9.26,-9.59) 9.68,-9.59 9.71,-9.56 11.69,-9.56 11.71,-9.58 v3(12.11,-9.58) ; v3(15.67,-13.15) 15.9,-12.92 15.9,-12.75 16.24,-12.41 16.7,-12.41 17.45,-13.16 19.96,-13.16 20.07,-13.05 v3(20.34,-13.05) ; v3(27.87,-14.48) 28.43,-15.04 U37.2@28.43,-16.45
  In1.Cu w0.08: v3(2.01,-10.31) 4.56,-10.31 4.73,-10.14 7.21,-10.14 7.48,-10.41 9,-10.41 9.26,-10.15 v3(9.26,-9.59) ; v2(13.22,-7.77) 12.11,-8.88 v3(12.11,-9.58) 12.11,-10.9 12.73,-11.52 13.8,-11.52 14.4,-12.12 14.4,-12.47 15.08,-13.15 v3(15.67,-13.15) ; v3(20.34,-13.05) 22.56,-13.05 23.99,-14.48 v3(27.87,-14.48)
  In8.Cu w0.08: v1(12.4,-7.77) 12.4,-8.58 12.16,-8.82 12.16,-10.28 12.3,-10.42 12.3,-11.03 13.02,-11.75 13.4,-11.75 13.94,-12.29 13.94,-16.19 13.84,-16.29 13.84,-16.65 14.2,-17.01 14.2,-17.83 15.81,-19.44 v1(15.81,-20.82) ; v2(13.22,-7.77) 12.79,-7.34 12.79,-5.62 13.03,-5.38 v1(13.58,-5.38)
  B.Cu w0.08: v1(12.4,-7.77) v2(13.22,-7.77) ; v1(13.58,-5.38) 12.2,-5.38 12,-5.18 12,-4.9 12.21,-4.69 12.6,-4.69 12.72,-4.81 13.59,-4.81 13.94,-4.46 U59.4@14.79,-4.46 ; U74.H2@15.76,-20.96 15.81,-20.91 v1(15.81,-20.82)
SA14: U21.70 U35.24 U59.3 U74.H4 | length 44.9
  F.Cu w0.08: v3(6.28,-12.11) 6.51,-12.34 U35.24@6.51,-14.5
  F.Cu w0.2: U21.70@2.32,-12.94 2.32,-11.84 v3(2.47,-11.69)
  In1.Cu w0.08: v3(2.47,-11.69) 3.5,-11.69 3.9,-12.09 6.26,-12.09 v3(6.28,-12.11) 6.28,-10.99 6.68,-10.59 9.16,-10.59 9.6,-10.15 9.6,-9.08 v2(10.35,-8.33)
  In8.Cu w0.08: v2(10.35,-8.33) 10.08,-8.06 10.08,-7.71 10.37,-7.42 10.37,-6.47 11.16,-5.68 11.66,-5.68 ; v1(11.66,-6.36) 11.66,-5.68 ; v1(12.31,-5.06) 11.97,-5.06 11.66,-5.37 11.66,-5.68 ; v1(14.65,-10.02) 14.74,-10.11 14.74,-14.28 15.27,-14.81 17.17,-14.81 17.57,-15.21 v1(17.57,-15.29) ; v1(18.94,-21.31) 18.94,-20.76 19.09,-20.61 19.09,-16.18 18.99,-16.08 v1(18.99,-15.82)
  B.Cu w0.08: v1(11.66,-6.36) 14.2,-6.36 14.65,-6.81 v1(14.65,-10.02) ; v1(12.31,-5.06) 12.37,-5 13.88,-5 13.92,-4.96 U59.3@14.79,-4.96 ; v1(17.57,-15.29) 17.69,-15.41 18.9,-15.41 18.99,-15.5 v1(18.99,-15.82) ; U74.H4@18.3,-20.96 18.59,-20.96 v1(18.94,-21.31)
SA15: U21.71 U35.25 U59.2 U74.H3 | length 44.7
  F.Cu w0.08: U35.25@5.91,-14.5 5.95,-14.46 v3(5.95,-13.62) ; v3(8.73,-18.99) 8.93,-19.19 9.89,-19.19 10.44,-18.64 15.64,-18.64 15.825,-18.825 16.775,-18.825 16.92,-18.97 17.28,-18.97 v3(17.69,-18.56)
  F.Cu w0.2: U35.25@5.91,-14.5 5.93,-14.52 5.93,-15.36 6.16,-15.59 v3(6.16,-15.76)
  In1.Cu w0.08: v3(2.82,-12.94) 3,-13.12 4.71,-13.12 5.21,-13.62 v3(5.95,-13.62) ; v3(6.16,-15.76) 6.16,-16.78 6.34,-16.96 6.34,-17.12 6.785,-17.565 7.925,-17.565 8.135,-17.775 8.675,-17.775 8.89,-17.99 8.89,-18.41 8.73,-18.57 v3(8.73,-18.99) v3@8.72,-18.98 ; v3(17.69,-18.56) 18.32,-17.93 18.32,-17.25 v2(17.7,-16.63)
  In8.Cu w0.08: v1(13.48,-10.07) 13.87,-10.07 14.53,-10.73 14.53,-14.59 14.94,-15 16.32,-15 16.75,-15.43 16.75,-15.68 v2(17.7,-16.63) 17.21,-17.12 17.21,-18.01 16.16,-19.06 16.16,-20.73 v1(16.44,-21.01) ; v1(13.8,-8.91) 14.2,-8.51 14.2,-7.1 v1(15.78,-5.52)
  B.Cu w0.08: v1(13.48,-10.07) 13.8,-9.75 v1(13.8,-8.91) ; v1(16.44,-21.01) 16.49,-20.96 U74.H3@17.03,-20.96
  B.Cu w0.2: U59.2@14.79,-5.46 15.72,-5.46 v1(15.78,-5.52)
SD0: J11.41 R375.1 U21.96 U22.46 U35.33 U36.17 U42.22 U49.3 U59.25 U61.L13 U67.3 U74.K2 | length 292
  F.Cu w0.08: v3(-10.22,36.64) -9.6,36.64 -7.88,34.92 -7.14,34.92 v2(-5.45,33.23) ; v3(-6.36,7.18) -5.68,7.18 -5.48,6.98 -5.48,6.54 -5.26,6.32 -1.25,6.32 -0.81,5.88 0.76,5.88 v3(0.84,5.96) 0.84,6.29 v2(1.24,6.69) ; U36.17@0.63,-24.91 1.8,-24.91 1.98,-24.73 v3(1.98,-23.66) ; v3(7.59,-18.65) 8.87,-18.65 9.21,-18.99 9.73,-18.99 10.3,-18.42 12.47,-18.42 v2(13.1,-17.79) ; v3(57.65,-12.78) 57.65,-14.15 58.66,-15.16 58.66,-15.85 58.84,-16.03 61.26,-16.03 62.57,-14.72 65.97,-14.72 66.49,-15.24 66.49,-15.7 v5(64.8,-17.39) ; U42.22@86.11,-21.225 86.11,-19.78 86.91,-18.98 v5(87.34,-18.98)
  F.Cu w0.2: v3(4.46,-19.65) 5.49,-19.65 v3(5.67,-19.47) ; U22.46@15.03,-7.76 15.98,-7.76 16.03,-7.71 v2(16.23,-7.71)
  F.Cu w0.3: J11.41@54.39,-11.43 56.56,-11.43 v3(56.81,-11.68)
  In1.Cu w0.08: v3(-10.22,36.64) -10.22,35.92 -10.81,35.33 -10.81,29.85 -8.92,27.96 -8.92,23.99 -9.23,23.68 -9.23,18.62 -6.91,16.3 -6.91,7.73 v3(-6.36,7.18) ; v3(0.84,5.96) 0.84,3.65 2.73,1.76 2.73,1.14 2.88,0.99 5.14,0.99 5.37,0.76 v3(5.37,0.56) ; v3(1.98,-23.66) 1.59,-23.27 1.59,-20.76 1.9,-20.45 3.93,-20.45 4.46,-19.92 v3(4.46,-19.65) ; v3(5.67,-19.47) 6.77,-19.47 v3(7.59,-18.65) ; v3(56.81,-11.68) 56.51,-11.98 56.51,-12.55 56.74,-12.78 v3(57.65,-12.78)
  In3.Cu w0.08: v5(64.8,-17.39) 66.34,-15.85 73.95,-15.85 74.23,-16.13 v4(75.65,-16.13)
  In4.Cu w0.08: v2(13.1,-17.79) 13.65,-17.79 14.38,-17.06 14.38,-8.62 15.29,-7.71 v2(16.23,-7.71)
  In5.Cu w0.08: v2(1.24,6.69) 1.96,5.97 7.59,5.97 7.89,5.67 8.45,5.67 8.77,5.99 12.38,5.99 13.77,4.6 23.38,4.6 v2(23.93,5.15) ; v2(13.1,-17.79) 13.69,-17.79 14.2,-17.28 14.2,-16.87 14.99,-16.08 15.46,-16.08 15.75,-16.37 15.75,-17.99 16.13,-18.37 16.73,-18.37 16.85,-18.25 28.29,-18.25 29.56,-16.98 31.86,-16.98 34.88,-13.96 38.02,-13.96 38.72,-14.66 40.08,-14.66 40.39,-14.35 42.55,-14.35 42.56,-14.36 46.41,-14.36 46.55,-14.22 52.41,-14.22 52.74,-14.55 61.96,-14.55 v5(64.8,-17.39) ; v4(75.65,-16.13) 76.9,-17.38 82.05,-17.38 83.61,-18.94 87.3,-18.94 v5(87.34,-18.98)
  In6.Cu w0.08: v2(16.23,-7.71) 16.23,-7.02 16.75,-6.5 21.33,-6.5 22.74,-5.09 22.74,0.98 22.2,1.52 22.2,3.42 v2(23.93,5.15)
  In8.Cu w0.08: v2(-5.45,33.23) -5,32.78 -5,31 -4.41,30.41 -4.41,28.36 v1(-3.44,27.39) ; v1(0.84,6.28) v1@0.84,6.29 ; v1(23.92,2.99) 23.92,5.14 v2(23.93,5.15) ; v1(32.07,3.43) 33.09,3.43 33.42,3.1 33.42,2.54 34.42,1.54 v1(34.59,1.54) ; v1(55.65,-19.82) 56.31,-20.48 56.31,-21.31 56.55,-21.55 60.8,-21.55 60.99,-21.74 60.99,-23.06 61.77,-23.84 63.59,-23.84 63.76,-23.67 v1(63.76,-23.41)
  In8.Cu w0.2: v1@0.84,6.29 v2(1.24,6.69)
  B.Cu w0.08: v1(-3.44,27.39) 1.84,27.39 1.95,27.28 1.95,27.2 1.955,27.195 U49.3@1.955,26.12 ; v2(13.1,-17.79) 14.63,-17.79 14.99,-17.43 15.25,-17.43 15.765,-17.945 U74.K2@15.765,-18.44 ; v1(23.92,2.99) 25.22,2.99 25.54,3.31 28.04,3.31 28.37,3.64 31.86,3.64 v1(32.07,3.43) ; v1(63.76,-23.41) 63.76,-21.99 64.4,-21.35 64.94,-21.35 66.04,-20.25 66.04,-19.13 65.28,-18.37 65.28,-17.87 v5(64.8,-17.39) ; 73.9,-12.47 74.21,-12.78 74.34,-12.91 74.34,-15.07 74.34,-15.59 74.62,-15.87 74.88,-16.13 v4(75.65,-16.13)
SD1: J11.43 R374.1 U21.95 U22.47 U35.34 U36.19 U42.21 U49.4 U59.26 U61.L16 U67.2 U74.L1 | length 259.1
  F.Cu w0.08: U36.19@0.63,-23.31 1.75,-23.31 2,-23.06 2,-22.02 v3(2.02,-22) ; v3@5.62,-20.14 v3(5.64,-20.14) ; v3(7.37,-20.1) 8.27,-20.1 8.46,-20.29 10.96,-20.29 11.13,-20.12 v2(11.73,-20.12) ; U22.47@15.03,-8.26 16.45,-8.26 16.8,-7.91 16.8,-6.97 17.26,-6.51 24.88,-6.51 v3(25.24,-6.15) ; J11.43@54.39,-10.13 56.41,-10.13 57.13,-10.85 57.13,-14.45 58.26,-15.58 58.26,-16.57 59.83,-18.14 59.83,-19.24 59.71,-19.36 59.71,-19.55 58.75,-20.51 v4(58.52,-20.51) ; v3(84.71,-19.68) 85.29,-19.68 85.61,-20 U42.21@85.61,-21.225
  F.Cu w0.2: U35.34@4.46,-20.15 4.47,-20.14 v3@5.62,-20.14
  F.Cu w0.3: v2(4.06,0.1) 4.1,0.06 U21.95@5.37,0.06
  In1.Cu w0.08: v3(2.02,-22) 4,-22 5.43,-23.43 6.61,-23.43 7.09,-22.95 7.09,-22.41 6.35,-21.67 6.35,-20.44 ; v3(5.64,-20.14) 5.94,-20.44 6.35,-20.44 ; v3(7.37,-20.1) 7.03,-20.44 6.35,-20.44 ; v3(25.24,-6.15) 25.23,-6.14 25.23,-3.52 25.57,-3.18 26.74,-3.18 27.5,-2.42 v2(27.5,-0.5) ; v4(82.08,-15.07) 82.36,-15.07 84.46,-17.17 84.46,-18.73 84.71,-18.98 v3(84.71,-19.68)
  In3.Cu w0.08: v2(4.06,0.1) 4.58,0.62 15.89,0.62 16.31,1.04 18.78,1.04 19.07,0.75 27.11,0.75 27.5,0.36 v2(27.5,-0.5)
  In4.Cu w0.08: v2(4.06,0.1) 3.46,0.7 1.96,0.7 1.22,-0.04 1.22,-1.6 3.34,-3.72 3.34,-18.18 4.77,-19.61 9.16,-19.61 9.67,-20.12 v2(11.73,-20.12)
  In6.Cu w0.08: v2(1.22,29) 1.22,26.58 3.9,23.9 3.9,18.3 3.25,17.65 3.25,16.575 3.45,16.375 3.45,6.6 4.2,5.85 4.2,1.025 4.05,0.875 4.05,0.11 v2(4.06,0.1)
  In8.Cu w0.08: v1(0.89,2.44) 0.89,3.06 1.11,3.28 2.2,3.28 2.96,2.52 3.61,2.52 3.83,2.3 3.83,1.15 4.06,0.92 v2(4.06,0.1) ; v2(1.22,29) 1.23,28.99 v1(1.23,26.1) ; v2(11.73,-20.12) 13.39,-20.12 v1(13.71,-19.8) ; v1(13.59,-17.2) 13.59,-18 13.64,-18.05 v1(13.64,-18.73) ; v1(38.1,1.37) 38.77,1.37 39.5,0.64 39.5,-2.13 39.88,-2.51 40.86,-2.51 41.13,-2.78 45.01,-2.78 45.54,-3.31 45.54,-6.06 46.33,-6.85 46.33,-9.68 46.83,-10.18 48.09,-10.18 49.6,-11.69 51.72,-11.69 52.87,-12.84 53.22,-12.84 53.61,-13.23 53.61,-15.87 53.56,-15.92 53.56,-17.37 53.97,-17.78 v1(55.65,-17.78) 56.12,-17.78 56.66,-18.32 57.15,-18.32 58.52,-19.69 v4(58.52,-20.51) 59.08,-20.51 59.92,-19.67 59.92,-19.275 60.02,-19.175 60.02,-18.63 60.33,-18.32 62.47,-18.32 62.81,-17.98 63.3,-17.98 ; v1(63.26,-23.41) 63.29,-23.38 63.29,-17.99 63.3,-17.98 ; v1(72.02,-18.07) 71.46,-17.51 70.47,-17.51 70.245,-17.735 70.245,-18.045 70.02,-18.27 67.626,-18.27 67.576,-18.32 64.77,-18.32 64.26,-17.81 63.77,-17.81 63.6,-17.98 63.3,-17.98 ; v1(74.01,-18.06) 74.01,-16.5 73.45,-15.94 73.45,-10.64 73.78,-10.31 v1(77.22,-10.31)
  B.Cu w0.08: v1(1.23,26.1) 1.25,26.12 U49.4@1.305,26.12 ; v1(13.59,-17.2) 13.62,-17.17 U74.L1@14.495,-17.17 ; v1(13.64,-18.73) 13.64,-19.38 13.71,-19.45 v1(13.71,-19.8) ; v2(27.5,-0.5) 27.5,0.15 28.24,0.89 29.42,0.89 29.54,0.77 32.32,0.77 32.49,0.6 33.12,0.6 33.56,1.04 35.46,1.04 35.64,0.86 36.33,0.86 36.84,1.37 v1(38.1,1.37) ; v1(72.02,-18.07) 72.03,-18.06 v1(74.01,-18.06) ; v1(77.22,-10.31) 77.22,-9.77 77.48,-9.51 78.52,-9.51 78.79,-9.78 78.79,-14.13 79.73,-15.07 v4(82.08,-15.07)
SD2: J11.45 R376.1 U21.94 U22.48 U35.35 U36.21 U42.19 U49.5 U59.27 U61.L15 U67.1 U74.L2 | length 257.7
  F.Cu w0.08: U36.21@0.63,-21.71 1.87,-21.71 1.95,-21.63 v3(2.34,-21.63) ; v2(2.95,0.12) 3.51,0.12 4.07,-0.44 U21.94@5.37,-0.44 ; U35.35@4.46,-20.65 5.6,-20.65 5.78,-20.83 6.31,-20.83 ; v3(5.59,-21.65) 6.01,-21.65 6.31,-21.35 6.31,-20.83 ; v3(7.53,-21.62) 7.53,-21.39 6.97,-20.83 6.31,-20.83 ; v3(9.48,-18.71) 9.64,-18.71 v2(10.71,-17.64) ; U22.48@15.03,-8.76 16.37,-8.76 16.96,-8.17 v2(18.01,-8.17) ; v4(72.33,-22.23) 73.49,-22.23 74.18,-22.92 v3(74.18,-27) ; v3(74.16,-27.88) 74.82,-28.54 77.932,-28.54 77.972,-28.58 78.74,-28.58 79.42,-27.9 82.32,-27.9 82.54,-28.12 v3(83.38,-28.12) ; v3(83.96,-22.57) 84.34,-22.57 84.61,-22.3 U42.19@84.61,-21.225
  In1.Cu w0.08: v3(2.34,-21.63) 5.57,-21.63 v3(5.59,-21.65) ; v3(7.53,-21.62) 7.53,-21.9 7.84,-22.21 8.3,-22.21 8.62,-21.89 8.62,-20.43 9.48,-19.57 v3(9.48,-18.71) ; v3(54.39,-8.88) 54.2,-8.88 53.91,-9.17 53.91,-9.7 54.08,-9.87 55.62,-9.87 55.8,-9.69 59.82,-9.69 61.28,-8.23 61.28,-7.63 v4(60.93,-7.28) ; v3(74.16,-27.88) 74.16,-27.02 v3(74.18,-27) ; v3(83.38,-28.12) 83.42,-28.08 83.42,-23.11 v3(83.96,-22.57)
  In3.Cu w0.08: v5(60.54,-22.1) 62.09,-22.1 63.46,-23.47 71.09,-23.47 v4(72.33,-22.23)
  In4.Cu w0.08: v2(2.32,28.94) 2.37,28.94 6.12,25.19 8.47,25.19 8.99,24.67 8.99,22.85 9.39,22.45 9.39,4.14 9.29,4.04 9.29,3.14 9.17,3.02 9.17,0.29 v2(9.06,0.18) ; v2(15.16,-16.57) 15.16,-16.2 18.08,-13.28 18.08,-8.24 v2(18.01,-8.17)
  In5.Cu w0.08: v2(10.71,-17.64) 10.79,-17.64 11.31,-18.16 11.36,-18.16 11.37,-18.15 14.14,-18.15 15.16,-17.13 v2(15.16,-16.57)
  In6.Cu w0.08: v2(9.06,0.18) 9.06,-0.69 9.67,-1.3 9.67,-3.86 11.46,-5.65 11.46,-8.47 12.26,-9.27 12.26,-10.13 12.85,-10.72 12.85,-14.19 13.53,-14.87 13.53,-18.05 13,-18.58 11.1,-18.58 10.71,-18.19 v2(10.71,-17.64)
  In8.Cu w0.08: v1(1.24,2.91) 2.25,2.91 3.08,2.08 3.08,1.37 2.95,1.24 v2(2.95,0.12) ; v1(1.3,24.9) 1.81,25.41 1.81,27.04 1.71,27.14 1.71,28.33 v2(2.32,28.94) ; v2(18.01,-8.17) 18.34,-7.84 18.34,-5.66 v1(18.64,-5.36) ; v1(40.58,-4.73) 42.32,-6.47 42.32,-10.06 43.15,-10.89 44.69,-10.89 45.63,-11.83 v1(45.63,-14.11) ; v1(50.44,-12.37) 50.52,-12.45 50.52,-14.53 50.16,-14.89 48.52,-14.89 48.34,-15.07 v1(48.34,-15.53) 49.02,-15.53 50.32,-16.83 50.32,-17.99 50.79,-18.46 55.32,-18.46 v1(55.65,-18.79) 55.22,-19.22 55.22,-20.1 55.45,-20.33 55.82,-20.33 56,-20.51 56,-21.45 58.08,-23.53 59.35,-23.53 59.7,-23.18 59.7,-22.76 60.36,-22.1 v5(60.54,-22.1) ; v1(53.32,-9.56) 53.32,-8.44 v1(54.03,-7.73) ; v1(55.17,-6.25) 55.69,-6.77 58.54,-6.77 58.9,-7.13 60.06,-7.13 60.21,-7.28 v4(60.93,-7.28)
  B.Cu w0.08: U49.5@0.655,26.12 0.655,25.125 0.88,24.9 v1(1.3,24.9) ; v2(2.95,0.12) 3.55,0.12 4,-0.33 4.59,-0.33 4.78,-0.52 7.65,-0.52 8.35,0.18 v2(9.06,0.18) ; v2(15.16,-16.57) 15.76,-17.17 U74.L2@15.765,-17.17 ; v1(18.64,-5.36) 18.74,-5.36 20.74,-3.36 24.62,-3.36 25.34,-4.08 27.62,-4.08 27.79,-3.91 30.3,-3.91 31.64,-2.57 33.12,-2.57 33.37,-2.32 33.37,0.15 33.76,0.54 36.03,0.54 36.39,0.18 36.39,-1.58 36.09,-1.88 36.09,-2.34 36.55,-2.8 41.07,-2.8 41.33,-3.06 41.33,-3.97 40.58,-4.72 v1(40.58,-4.73) ; v1(45.63,-14.11) 46.92,-14.11 v1(48.34,-15.53) ; v1(50.44,-12.37) 50.38,-12.31 50.38,-9.69 50.71,-9.36 52.7,-9.36 52.9,-9.56 v1(53.32,-9.56) ; v1(54.03,-7.73) 54.66,-7.1 54.66,-6.76 v1(55.17,-6.25) ; v5(60.54,-22.1) 60.54,-22.06 61.37,-21.23 62.43,-21.23 62.66,-21.46 U67.1@62.66,-23.41
  B.Cu w0.4: U61.L15@0.835,3.575 1.24,3.17 v1(1.24,2.91)
SD3: J11.3 R373.1 U21.93 U22.49 U35.36 U36.23 U42.18 U49.6 U59.28 U61.L14 U67.64 U74.M1 | length 444.5
  F.Cu w0.08: v3(-11.82,-17.93) -11.56,-18.19 -10.34,-18.19 v3(-9.93,-18.6) ; v3(-9.93,-20.37) -2.68,-20.37 v3(-2.67,-20.38) ; v3(0.63,-20.11) 2.31,-20.11 3.35,-21.15 U35.36@4.46,-21.15 ; v2(2.56,-1.21) 2.56,-0.74 2.93,-0.37 3.69,-0.37 4.26,-0.94 U21.93@5.37,-0.94 ; v2(12.795,-9.875) 13.41,-9.26 U22.49@15.03,-9.26 ; J11.3@54.39,-35.53 62.55,-35.53 v3(62.56,-35.52) ; v4(77.23,-12.63) 77.36,-12.76 78.99,-12.76 v3(79.03,-12.72) ; v3(83.95,-19.22) 84.11,-19.38 U42.18@84.11,-21.225
  In1.Cu w0.08: v2(-15.75,-15.24) -15.75,-15.54 -15.85,-15.64 -15.85,-16.29 -15.75,-16.39 -15.75,-17.37 -15.52,-17.6 -12.54,-17.6 -12.21,-17.93 v3(-11.82,-17.93) ; v3(-9.93,-20.37) v3(-9.93,-18.6) ; v3(-2.67,-20.38) 0.36,-20.38 v3(0.63,-20.11) ; v3(62.56,-35.52) 62.56,-35.56 64.39,-37.39 70.69,-37.39 72.29,-35.79 76.14,-35.79 77.28,-34.65 79.61,-34.65 80.28,-33.98 80.28,-30.23 80.88,-29.63 82.32,-29.63 82.81,-29.14 82.81,-28.27 82.43,-27.89 82.43,-24.22 82.87,-23.78 82.87,-22.94 84.1,-21.71 84.1,-20.56 83.95,-20.41 v3(83.95,-19.22) 83.95,-17.56 82.235,-15.845 81.885,-15.845 81.48,-15.44 81.48,-13.26 80.21,-11.99 79.63,-11.99 79.03,-12.59 v3(79.03,-12.72)
  In3.Cu w0.08: v2(-15.75,-15.24) -16.27,-15.24 -16.5,-15.47 -24.66,-15.47 -27.85,-12.28 -32.06,-12.28 -33.09,-11.25 -38.56,-11.25 -39.39,-10.42 -39.39,-8.81 -39.28,-8.7 -17.65,-8.7 -16.91,-9.44 -12.49,-9.44 -11.52,-10.41 9.61,-10.41 9.94,-10.08 10.76,-10.08 11.13,-10.45 12.22,-10.45 v2(12.795,-9.875)
  In4.Cu w0.08: v2(2.56,-1.21) 2.56,-2.22 4.75,-4.41 4.75,-8.55 8.17,-11.97 11.4,-11.97 11.67,-11.7 13.49,-11.7 13.9,-11.29 13.9,-10.57 13.205,-9.875 v2(12.795,-9.875)
  In6.Cu w0.08: v2(2.56,-1.21) 3.29,-1.94 3.29,-4.95 3.49,-5.15 5.02,-5.15 5.47,-4.7 5.47,9.34 5.76,9.63 5.76,17.99 4.57,19.18 4.57,38.16 v2(3.88,38.85)
  In8.Cu w0.08: v1(-0.02,26.11) -0.02,26.95 -2.24,29.17 -2.43,29.17 -2.84,29.58 -2.84,32.62 -2.85,32.62 -3.08,32.85 -3.08,33.6 -2.84,33.84 -2.84,35.36 -3.02,35.54 -3.02,39.17 -2.41,39.78 -1.86,39.78 -0.96,40.68 -0.66,40.68 -0.3,40.32 v1(0.07,40.32) ; v1(1.47,2.27) 1.89,2.27 2.31,1.85 2.31,-0.98 2.54,-1.21 v2(2.56,-1.21) ; v2(12.795,-9.875) 13.19,-9.48 13.44,-9.48 13.67,-9.71 v1(15.25,-9.71) 15.25,-11.37 15.59,-11.71 15.59,-12.9 15.23,-13.26 v1(15.23,-14.2) ; v1(20.54,1.79) 20.54,2.65 21.09,3.2 21.09,5.47 20.88,5.68 20.88,8.46 21.51,9.09 v1(21.92,9.09) ; v1(21.06,-6.2) 21.06,-5.39 v1(21.07,-5.38) 21.07,-3.64 21.52,-3.19 21.52,0.85 21.38,0.99 v1(21.38,1.46) ; v1(42.21,0.92) 42.21,-0.53 v1(42.61,-0.93) ; v1(43.18,1.73) v1(43.18,3.05) ; v1(50.53,-6.5) 50.54,-6.51 53.63,-6.51 54.47,-7.35 54.47,-8.53 55.27,-9.33 57.63,-9.33 ; v1(55.65,-16.77) 55.9,-16.52 55.9,-14.67 55.18,-13.95 55.18,-13.47 55.35,-13.3 56.23,-13.3 56.43,-13.5 58.15,-13.5 58.37,-13.28 58.37,-11.05 57.63,-10.31 57.63,-9.33 ; v1(59.54,-8.33) 59.54,-8.36 58.57,-9.33 57.63,-9.33 ; v1(59.73,-23.74) 59.74,-23.74 60.75,-24.75 v1(60.75,-25.31) ; v1(76.52,-8.03) 76.52,-8.33 v1(78.49,-10.3)
  B.Cu w0.08: v1(-0.02,26.11) -0.01,26.12 U49.6@0.005,26.12 ; v1(0.07,40.32) 0.3,40.09 2.64,40.09 v2(3.88,38.85) ; U61.L14@0.83,4.84 1.59,4.08 1.59,3.31 1.68,3.22 1.68,2.77 1.47,2.56 v1(1.47,2.27) ; U74.M1@14.495,-15.9 14.98,-15.9 15.21,-15.67 15.21,-14.22 v1(15.23,-14.2) ; v1(15.25,-9.71) 15.29,-9.67 15.29,-6.96 16.08,-6.17 21.03,-6.17 v1(21.06,-6.2) ; v1(20.54,1.79) 20.87,1.46 v1(21.38,1.46) ; v1(21.07,-5.38) 22.12,-5.38 22.93,-4.57 28.33,-4.57 28.44,-4.46 30.97,-4.46 31.51,-3.92 31.51,-3.19 31.95,-2.75 33.34,-2.75 33.61,-2.48 33.61,-0.12 33.77,0.04 U59.28@34.59,0.04 ; v1(21.92,9.09) 32.76,9.09 33.28,9.61 35.76,9.61 36.48,10.33 40.72,10.33 41.74,11.35 42.1,11.35 42.35,11.1 42.35,10.32 42.72,9.95 43.29,9.95 44.23,9.01 46.62,9.01 46.88,8.75 46.88,7.23 47.34,6.77 47.34,5.15 46.11,3.92 44.875,3.92 43.935,2.98 43.25,2.98 v1(43.18,3.05) ; v1(42.21,0.92) 42.21,1.33 42.61,1.73 v1(43.18,1.73) ; v1(42.61,-0.93) 42.61,-2.05 41.56,-3.1 41.56,-4.12 41.33,-4.35 41.33,-5.07 44.12,-7.86 49.17,-7.86 v1(50.53,-6.5) ; v1(55.65,-16.77) 56.11,-16.77 56.22,-16.88 56.22,-19.37 56.67,-19.82 58.83,-19.82 59.87,-20.86 59.87,-23.23 59.73,-23.37 v1(59.73,-23.74) ; v1(59.54,-8.33) 59.73,-8.52 62.45,-8.52 62.55,-8.42 68.38,-8.42 68.92,-7.88 70.33,-7.88 70.4,-7.95 74.71,-7.95 75.16,-7.5 75.99,-7.5 v1(76.52,-8.03) ; v4(77.23,-12.63) 77.64,-12.63 77.76,-12.75 78.28,-12.75 78.56,-12.47 78.56,-11.18 78.49,-11.11 v1(78.49,-10.3)
SD4: J11.5 R378.1 U21.92 U22.51 U35.39 U36.26 U42.17 U49.7 U59.32 U61.L12 U67.63 U74.L4 | length 353.8
  F.Cu w0.08: U36.26@-14.42,-20.11 -13.26,-20.11 -13.08,-19.93 -13.08,-18.7 -12.9,-18.52 -12.43,-18.52 -11.67,-19.28 -11.67,-20.25 -11.52,-20.4 -10.72,-20.4 -10.72,-20.45 -10.57,-20.6 -10.57,-21.83 -10.39,-22.01 -2.01,-22.01 -1.48,-22.54 v3(-1.48,-24.55) ; v3(-0.84,6.7) 0.31,6.7 v2(0.32,6.69) ; v3(-0.52,-0.11) 1.16,-0.11 1.79,0.52 2.17,0.52 2.43,0.26 v3(2.43,-0.06) ; U35.39@4.46,-22.65 5.76,-22.65 6.27,-22.14 6.92,-22.14 7.45,-22.67 v3(7.45,-24.66) 7.45,-25.32 8.205,-26.075 12.075,-26.075 12.41,-25.74 14.17,-25.74 v3(14.22,-25.69) ; v3(16.56,-11.97) 16.56,-11.29 16.58,-11.27 16.58,-9.18 16.82,-8.94 17.56,-8.94 17.82,-9.2 17.82,-9.44 v2(17.37,-9.89) ; J11.5@54.39,-34.23 56.3,-34.23 56.61,-34.54 74.02,-34.54 74.77,-35.29 v4(75.02,-35.29) ; v3(82.3,-29.07) 85.662,-29.07 v5(85.716,-29.125)
  In1.Cu w0.08: v3(-1.48,-24.55) 0.05,-24.55 0.98,-25.48 3.02,-25.48 4.2,-24.3 6.23,-24.3 6.59,-24.66 v3(7.45,-24.66) ; v3(-0.84,6.7) -0.84,1.64 -0.52,1.32 v3(-0.52,-0.11) ; v3(2.43,-0.06) 2.72,-0.35 4.54,-0.35 5.37,-1.18 v3(5.37,-1.44) ; v3(14.22,-25.69) 14.22,-23.34 14.39,-23.17 14.39,-21.68 15.03,-21.04 15.31,-21.04 15.79,-20.56 15.79,-18.75 15.65,-18.61 15.65,-16.98 15.84,-16.79 15.84,-15.33 16.31,-14.86 16.31,-13.9 17.03,-13.18 17.03,-12.44 v3(16.56,-11.97) ; v3(82.3,-29.07) 81.29,-28.06 81.29,-25.82 81.93,-25.18 81.93,-24.24 82.63,-23.54 82.63,-22.44 83.61,-21.46 v3(83.61,-21.225)
  In4.Cu w0.08: v2(0.32,6.69) 0.9,7.27 4.71,7.27 6.46,5.52 6.46,0.61 7.98,-0.91 13.09,-0.91 14.93,-2.75 14.93,-5.59 17.41,-8.07 17.41,-8.56 17.42,-8.56 17.85,-8.99 17.85,-9.54 17.5,-9.89 v2(17.37,-9.89) ; v4(75.02,-35.29) 75.02,-35.24 75.66,-34.6 75.66,-32.85 78.61,-29.9 81.81,-29.9 82.585,-29.125 v5(85.716,-29.125)
  In6.Cu w0.08: v2(0.32,6.69) 0.875,7.245 0.875,22.805 v2(0.35,23.33)
  In8.Cu w0.08: v1(0.27,24.89) 0.27,24.34 0.35,24.26 v2(0.35,23.33) ; v1(18.67,-17.2) 18.67,-14.48 17.73,-13.54 17.73,-11.97 17.37,-11.61 v2(17.37,-9.89) 17.71,-9.55 17.71,-8.98 17.4,-8.67 17.4,-7.49 17.82,-7.07 17.82,-5.18 18.97,-4.03 18.97,-2.46 18.9,-2.39 v1(18.9,-1.65) ; v1(30.74,-1.71) 30.74,2.18 31.2,2.64 31.5,2.64 31.71,2.85 31.71,3.48 32.54,4.31 v1(32.82,4.31) ; v1(32.59,-1.7) 32.85,-1.96 v1(34.59,-1.96) ; v1(38.12,9.15) 38.12,8.14 39.47,6.79 v1(39.47,4.49) ; v1(41.65,10.62) 43.77,10.62 44.87,11.72 45.82,11.72 46.86,12.76 v1(46.86,15.07) ; v1(50.48,14.4) 50.48,10.28 51.11,9.65 57.64,9.65 58.41,8.88 v1(58.41,7.81) ; v1(58.41,7.11) 58.41,7.1 59,6.51 59,3.61 61.1,1.51 61.1,0.55 64.01,-2.36 64.01,-2.78 61.58,-5.21 61.58,-11.52 60.87,-12.23 60.48,-12.23 60.08,-12.63 v1(60.08,-14.2) ; v1(66.51,-25.42) 66.51,-22.59 69.01,-20.09 v1(69.01,-19.59) ; v1(74.69,-17.43) 74.69,-15.16 76.63,-13.22 78.11,-13.22 78.39,-13.5 v1(79.19,-13.5) ; v1(82.17,-14.09) 82.91,-14.09 83.68,-14.86 83.68,-27.105 85.7,-29.125 v5(85.716,-29.125)
  B.Cu w0.08: U49.7@-0.645,26.12 -0.645,25.165 -0.37,24.89 v1(0.27,24.89) ; v2(0.32,6.69) 0.32,6.87 U61.L12@0.83,7.38 ; U74.L4@18.3,-17.15 18.35,-17.2 v1(18.67,-17.2) ; v1(18.9,-1.65) 19.97,-0.58 26.34,-0.58 26.69,-0.93 26.7,-0.93 26.7,-1.22 27.19,-1.71 v1(30.74,-1.71) 30.75,-1.7 v1(32.59,-1.7) ; v1(32.82,4.31) 33.2,4.31 33.32,4.43 34.95,4.43 34.97,4.41 38.95,4.41 39.03,4.49 v1(39.47,4.49) ; v1(38.12,9.15) 38.12,9.65 38.57,10.1 40.82,10.1 41.34,10.62 v1(41.65,10.62) ; v1(46.86,15.07) 46.86,14.45 47.27,14.04 48.67,14.04 49.03,14.4 v1(50.48,14.4) ; R378.1@55.65,-15.64 56.19,-15.64 57.63,-14.2 v1(60.08,-14.2) 60.69,-14.2 61.43,-14.94 64.21,-14.94 66.15,-16.88 69.03,-16.88 ; v1(58.41,7.11) v1(58.41,7.81) ; U67.63@60.76,-25.91 64.1,-25.91 64.59,-25.42 v1(66.51,-25.42) ; v1(69.01,-19.59) 69.01,-16.9 68.99,-16.88 69.03,-16.88 ; v1(74.69,-17.43) 70.71,-17.43 70.16,-16.88 69.03,-16.88 ; v1(79.19,-13.5) 79.78,-14.09 v1(82.17,-14.09)
SD5: J11.7 R377.1 U21.91 U22.52 U35.40 U36.28 U42.16 U49.8 U59.33 U61.M16 U67.62 U74.M2 | length 309.3
  F.Cu w0.08: v3(-10.26,-21.66) v3(-1.56,-21.66) -1.56,-19.93 v3(-1.59,-19.9) ; v3(-0.27,-1.58) 0.29,-1.58 1.47,-0.4 v3(1.47,-0.33) ; v3(2.32,-23.07) 2.35,-23.1 U35.40@4.46,-23.1 ; v3(3.84,-2.24) 4.14,-1.94 U21.91@5.37,-1.94 ; J11.7@54.39,-32.98 56.89,-32.98 57.06,-32.81 v3(57.45,-32.81)
  F.Cu w0.2: v2(16.92,-9.42) 16.92,-10.15 17.13,-10.36 U22.52@17.13,-11.26
  In1.Cu w0.08: v3(-14.42,-21.71) -14.4,-21.73 -10.33,-21.73 v3(-10.26,-21.66) ; v3(-1.59,-19.9) -1.97,-19.52 -2.67,-19.52 -2.91,-19.28 -2.91,-9.78 -1.36,-8.23 -1.09,-8.23 0.2,-6.94 0.2,-6.34 1.01,-5.53 1.01,-4.65 -0.27,-3.37 v3(-0.27,-1.58) ; v3(-1.56,-21.66) 0.9,-21.66 1.25,-22.01 1.25,-23.67 1.63,-24.05 2.09,-24.05 2.32,-23.82 v3(2.32,-23.07) ; v2(1.48,1.76) 1.48,1.26 1.24,1.02 1.24,-0.1 v3(1.47,-0.33) 1.47,-0.73 1.2,-1 1.2,-1.64 1.48,-1.92 3.52,-1.92 v3(3.84,-2.24) ; v3(57.45,-32.81) 61.59,-32.81 62.27,-32.13 74.51,-32.13 75.99,-33.61 v4(75.99,-35.29) ; v5(79.87,-12.53) 80.26,-12.53 81.15,-13.42 81.15,-16.42 83.6,-18.87 83.6,-20.21 83.11,-20.7 v3(83.11,-21.225)
  In3.Cu w0.08: v2(16.92,-9.42) 17.14,-9.2 17.6,-9.2 19.06,-10.66 34.79,-10.66 35.14,-10.31 38.67,-10.31 39.31,-9.67 40.18,-9.67 40.77,-9.08 v4(41.49,-9.08)
  In4.Cu w0.08: v2(1.48,1.76) 1.55,1.69 4.29,1.69 7.17,-1.19 12.88,-1.19 14.18,-2.49 14.18,-16.56 13.43,-17.31 12.81,-17.31 12.58,-17.54 12.58,-18.09 12.8,-18.31 14.13,-18.31 15.73,-16.71 16.3,-16.71 v2(16.39,-16.62)
  In6.Cu w0.08: v2(-0.43,29.38) -0.45,29.36 -0.45,22.875 -0.05,22.475 -0.05,19.075 0.65,18.375 0.65,8 -0.125,7.225 -0.125,6.575 0.2,6.25 0.725,6.25 0.925,6.05 0.925,5.25 1.48,4.695 v2(1.48,1.76) ; v2(16.39,-16.62) 16.39,-15.86 15.98,-15.45 15.98,-10.36 v2(16.92,-9.42)
  In8.Cu w0.08: v1(-2.46,28.55) -1.31,27.4 v1(-1.31,26.81) ; v1(46.65,-8.51) 48.64,-8.51 v1(49.07,-8.94) ; v1(59.86,-18.07) 59.86,-17.65 60.38,-17.13 60.38,-14.51 60.64,-14.25 v1(60.64,-13.69) 61.03,-13.3 61.58,-13.3 62.03,-12.85 62.03,-8.96 62.24,-8.75 v1(62.24,-7.62) ; v1(65.67,-26.17) 66.55,-26.17 67.4,-27.02 67.4,-27.17 67.57,-27.34 68.08,-27.34 69.66,-25.76 72.65,-25.76 73.18,-26.29 73.18,-30.58 73.54,-30.94 v1(73.79,-30.94)
  B.Cu w0.08: v1(-2.46,28.55) -1.8,28.55 -0.97,29.38 v2(-0.43,29.38) ; v1(-1.31,26.81) -1.31,26.135 U49.8@-1.295,26.12 ; v2(1.48,1.76) 1.86,1.76 2.1,2 U61.M16@2.1,2.3 ; U74.M2@15.765,-15.9 15.765,-15.905 16.37,-16.51 16.37,-16.6 v2(16.39,-16.62) ; U59.33@34.59,-2.46 35.79,-2.46 36.35,-3.02 40.89,-3.02 41.11,-3.24 41.11,-3.74 40.26,-4.59 40.26,-4.94 40.39,-5.07 40.94,-5.07 42.26,-6.39 42.26,-7.05 41.645,-7.665 41.185,-7.665 40.94,-7.91 40.94,-8.55 41.47,-9.08 v4(41.49,-9.08) 41.49,-9.06 42.32,-8.23 46.37,-8.23 v1(46.65,-8.51) ; v1(49.07,-8.94) 49.09,-8.96 55.28,-8.96 55.8,-9.48 55.8,-11.16 56.49,-11.85 56.49,-14.32 56.16,-14.65 56.12,-14.65 56.11,-14.66 R377.1@55.65,-14.66 ; 56.49,-13.78 56.5,-13.77 59.6,-13.77 59.68,-13.69 v1(60.64,-13.69) ; v1(59.86,-18.07) 59.86,-19.7 60.48,-20.32 60.48,-21.48 60.05,-21.91 60.05,-23.87 58.9,-25.02 58.9,-25.89 59.42,-26.41 63.95,-26.41 64.34,-26.02 65.52,-26.02 v1(65.67,-26.17) ; v1(62.24,-7.62) 62.69,-7.17 62.94,-7.17 63.57,-6.54 64,-6.54 64.15,-6.39 67.42,-6.39 68.59,-5.22 73.57,-5.22 74.63,-6.28 76,-6.28 79.87,-10.15 v5(79.87,-12.53) ; v1(73.79,-30.94) 73.79,-32.49 75.99,-34.69 v4(75.99,-35.29)
SD6: J11.9 R381.1 U21.89 U22.53 U35.41 U36.30 U42.14 U49.9 U59.34 U61.M15 U67.61 U74.M3 | length 318.2
  F.Cu w0.08: U36.30@-14.42,-23.31 -12.5,-23.31 v3(-12.39,-23.42) ; v3(-11.18,-23.45) -11.18,-24.31 -9.67,-25.82 -3.52,-25.82 -1.83,-27.51 v3(-1.83,-29.21) ; v2(3.35,-0.79) 3.35,-2.58 3.71,-2.94 U21.89@5.37,-2.94 ; U35.41@4.46,-23.6 5.73,-23.6 6.06,-23.93 6.06,-24.6 v3(5.85,-24.81) ; v3(8.35,-25.69) 8.565,-25.905 11.865,-25.905 12.23,-25.54 13.06,-25.54 13.35,-25.25 v3(14.55,-25.25) ; v2(13.37,-11.08) 13.37,-11.89 v3(13.52,-12.04) ; v3(14.22,-19.91) 15.27,-19.91 15.65,-20.29 15.65,-21.99 15.24,-22.4 v3(14.68,-22.4) ; v3@56.56,-31.68 v3(56.57,-31.67) ; v3(59.43,-31.65) 62.78,-31.65 64.43,-30 64.43,-28.51 63.89,-27.97 63.62,-27.97 63.05,-27.4 v5(63.05,-26.97) ; v3(76.13,-27.69) 76.15,-27.71 82.68,-27.71 82.76,-27.79 85.61,-27.79 86.21,-27.19 86.21,-24.76 85.15,-23.7 84.35,-23.7 84.26,-23.79 81.91,-23.79 81.59,-23.47 81.59,-22.91 82.11,-22.39 U42.14@82.11,-21.225
  F.Cu w0.2: J11.9@54.39,-31.68 v3@56.56,-31.68
  In1.Cu w0.08: v3(-12.39,-23.42) -11.21,-23.42 v3(-11.18,-23.45) ; v3(-1.83,-29.21) 0.21,-29.21 0.4,-29.02 0.4,-27.26 2,-25.66 3.28,-25.66 4.13,-24.81 v3(5.85,-24.81) 5.85,-25.32 6.08,-25.55 7.94,-25.55 8.08,-25.69 v3(8.35,-25.69) ; v2(13.37,-11.08) 14.69,-11.08 14.87,-11.26 v3(17.63,-11.26) ; v3(13.52,-12.04) 13.8,-12.32 13.8,-12.87 14.95,-14.02 14.95,-16.05 14.76,-16.24 14.76,-17.26 14.22,-17.8 v3(14.22,-19.91) ; v3(14.55,-25.25) 14.68,-25.12 v3(14.68,-22.4) ; v3(56.57,-31.67) 56.58,-31.66 59.42,-31.66 v3(59.43,-31.65) ; v3(76.13,-27.69) 76.13,-19.96 77.86,-18.23 77.86,-12.48 v4(78.08,-12.26)
  In4.Cu w0.08: v2(3.35,-0.79) 4.41,-0.79 5.34,-1.72 5.34,-6.28 7.15,-8.09 8.63,-8.09 11.62,-11.08 v2(13.37,-11.08)
  In5.Cu w0.08: v5(59.66,-12.63) 60.14,-12.15 67.53,-12.15 67.92,-11.76 71.4,-11.76 72.75,-13.11 77.75,-13.11 78.08,-12.78 v4(78.08,-12.26)
  In6.Cu w0.08: v2(1.19,41.15) 2.325,41.15 3,40.475 3,30.275 2.775,30.05 2.775,25.35 4.1,24.025 4.1,17.7 4.425,17.375 4.425,9.875 4.85,9.45 4.85,-0.025 4.085,-0.79 v2(3.35,-0.79) ; v5(59.66,-12.63) 59.66,-13.16 61.38,-14.88 62.25,-14.88 62.32,-14.95 62.36,-14.95 63.05,-15.64 v5(63.05,-26.97)
  In8.Cu w0.08: v1(-3.75,38.42) -3.75,35.42 -3.44,35.11 -3.44,34.22 -3.68,33.98 -3.68,32.42 -3.42,32.16 -3.42,28.67 -2.02,27.27 v1(-2.02,26.82) ; v1(0.84,38.83) 1.19,39.18 v2(1.19,41.15) ; v1(2.76,1.86) 2.76,1.35 2.48,1.07 2.48,-0.1 2.73,-0.35 2.93,-0.35 3.35,-0.77 v2(3.35,-0.79) ; v1(15.78,-5.07) 13.1,-5.07 12.46,-5.71 12.46,-7.37 12.71,-7.62 12.71,-8.61 12.37,-8.95 12.37,-10.1 13.35,-11.08 v2(13.37,-11.08) 14.2,-11.08 14.33,-11.21 14.33,-15.15 14.8,-15.62 v1(16.41,-15.62) ; v1(39.48,-3.37) 39.48,-4.16 39.78,-4.46 40.34,-4.46 40.56,-4.24 42.06,-4.24 43.19,-5.37 v1(43.19,-8.61) ; v1(55.65,-13.67) 55.67,-13.69 59.21,-13.69 59.66,-13.24 v5(59.66,-12.63)
  B.Cu w0.08: v1(-3.75,38.42) -2.81,38.42 -2.7,38.53 -2.06,38.53 -1.86,38.73 -0.61,38.73 -0.09,39.25 0.42,39.25 v1(0.84,38.83) ; v1(-2.02,26.82) -2.02,26.195 U49.9@-1.945,26.12 ; U61.M15@2.1,3.57 2.68,2.99 2.68,2.27 2.76,2.19 v1(2.76,1.86) ; v1(15.78,-5.07) 16,-5.07 16.17,-5.24 16.17,-5.68 16.33,-5.84 22.48,-5.84 22.97,-5.35 23.41,-5.35 23.53,-5.47 26.56,-5.47 26.64,-5.39 31.07,-5.39 31.89,-4.57 31.89,-3.27 32.2,-2.96 35.81,-2.96 36.14,-3.29 39.4,-3.29 v1(39.48,-3.37) ; v1(16.41,-15.62) 16.6,-15.62 16.86,-15.88 U74.M3@17.03,-15.88 ; v1(43.19,-8.61) 43.73,-8.61 44.39,-9.27 46.53,-9.27 46.78,-9.52 49.18,-9.52 49.53,-9.17 55.04,-9.17 55.58,-9.71 55.58,-11.57 56.25,-12.24 56.25,-13.43 56.01,-13.67 v1(55.65,-13.67) ; U67.61@60.75,-26.91 62.99,-26.91 v5(63.05,-26.97)